# Altium PCB PCB_MEZON.PcbDoc
Units mm, origin at the board's own origin, x right, y up, seen from the top; angles counter-clockwise.
Board outline 76 x 56 mm, 2 copper layers (Top, GND), stack 0.325 mm thick; 4 components, 28 nets, 106 pads, 9 vias.
Unrouted connection lines stored in the file: 6.
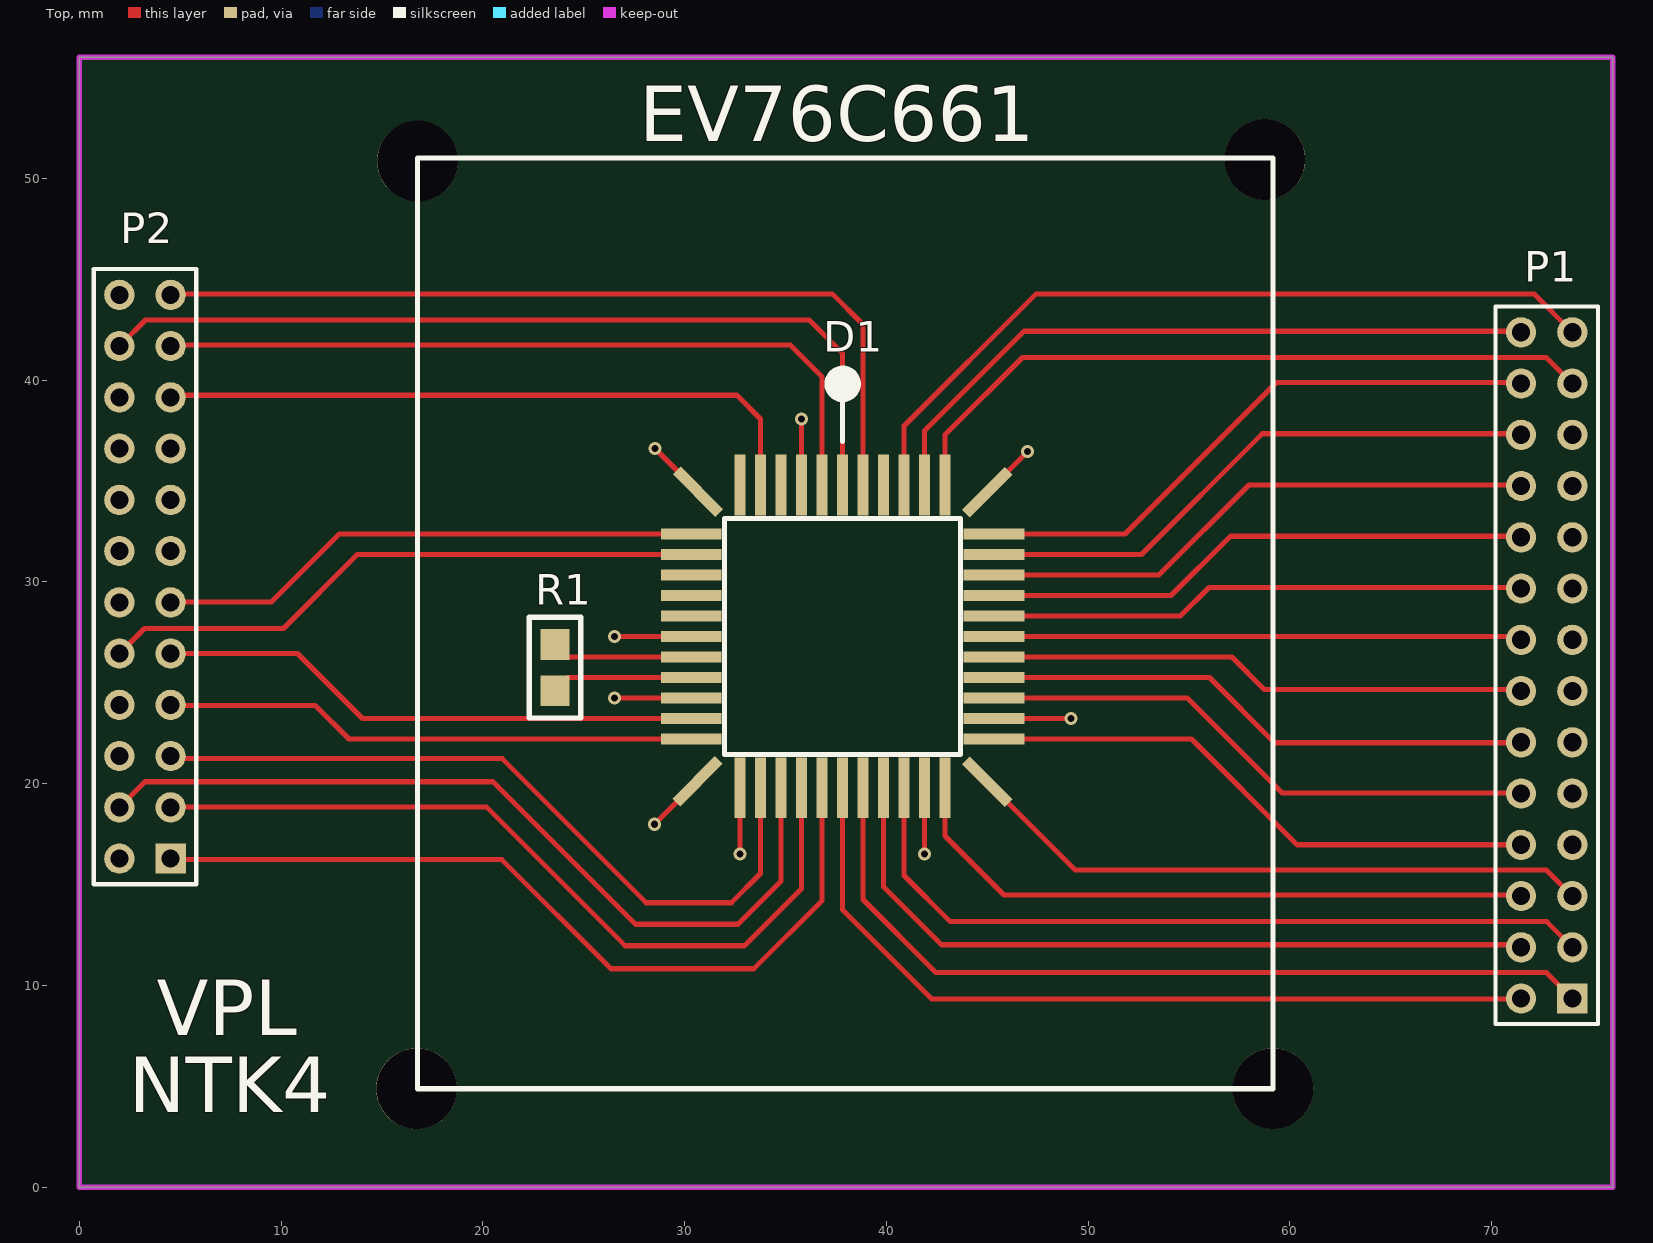
[diagram p0: Top view]
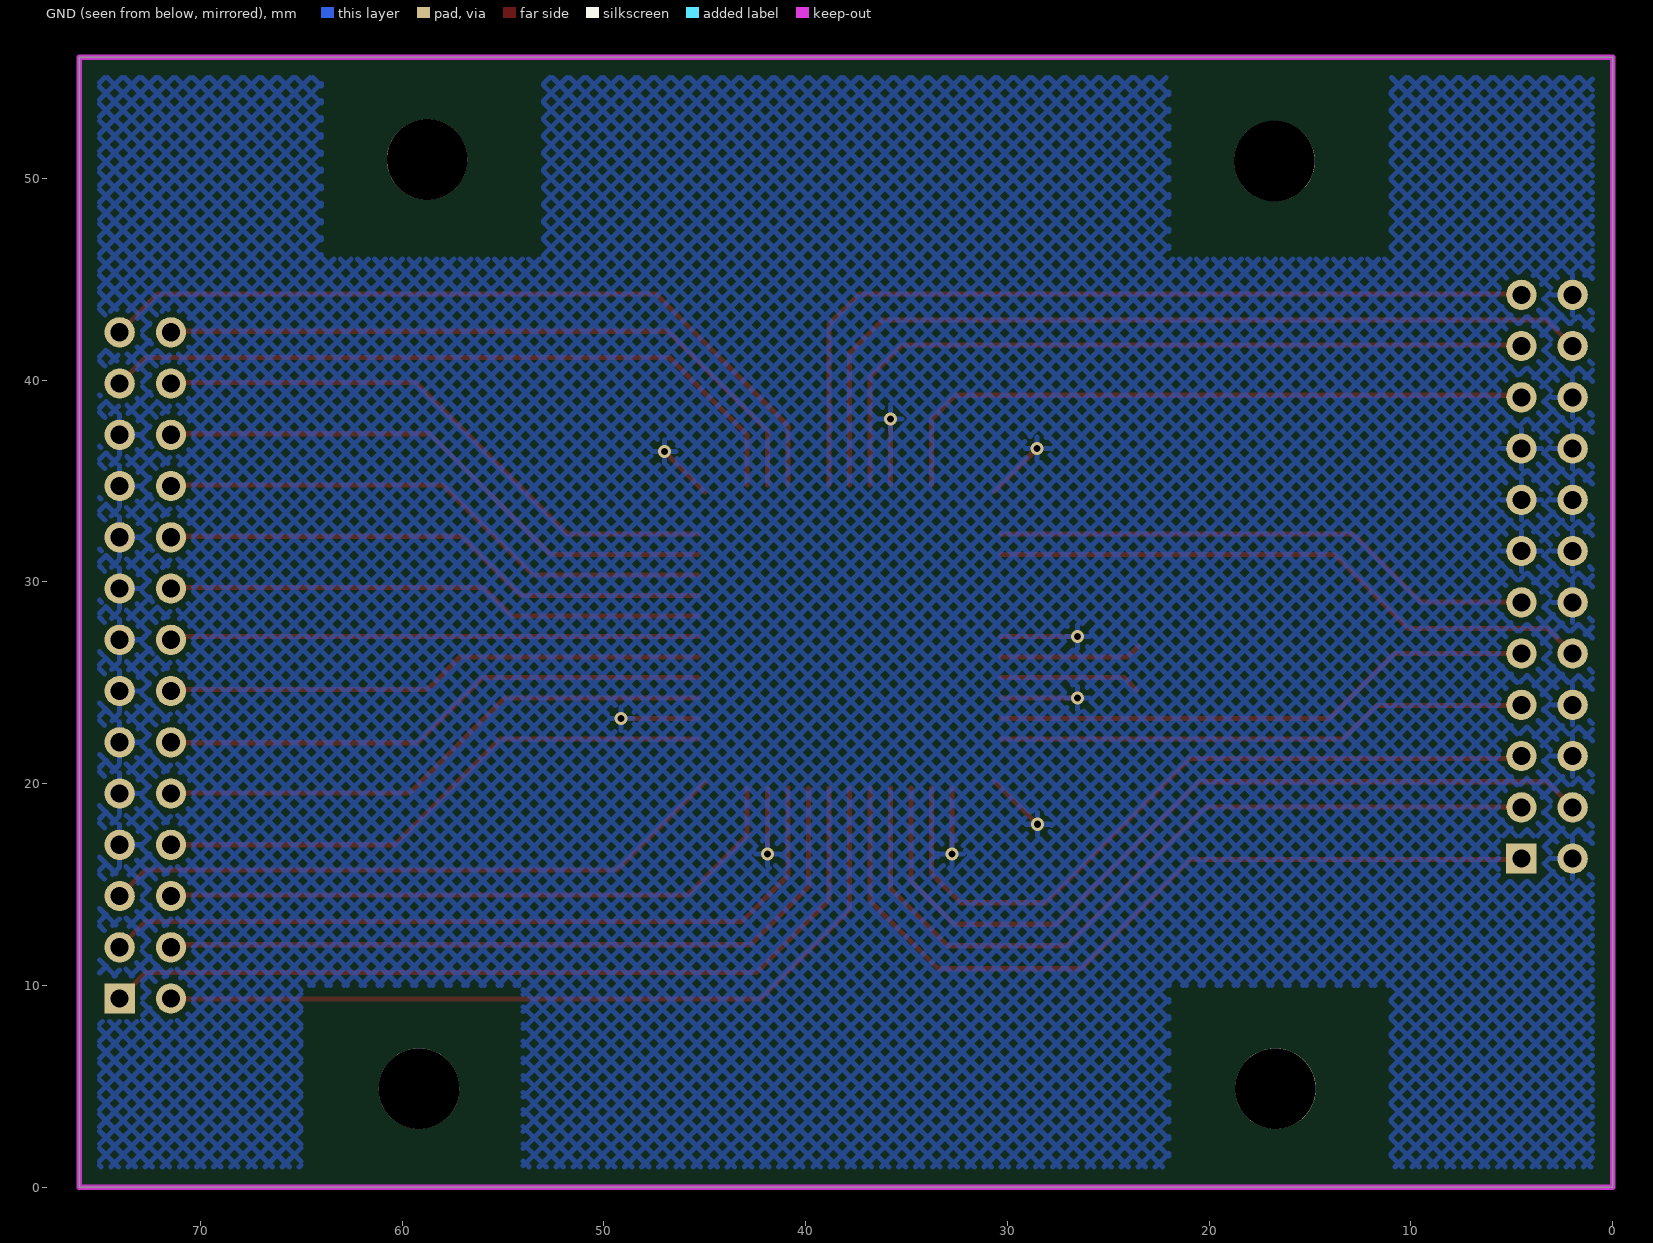
[diagram p1: GND view, seen from below]

## Layer stack, top to bottom
Top Solder: solder mask 0.0102, Solder Resist, Dk 3.5
Top: signal copper 0.0356
Dielectric 1: core 0.254, FR-4, Dk 4.2
GND: signal copper 0.0356
Bottom Solder: solder mask 0.0102, Solder Resist, Dk 3.5

## Board outline
0,0 76,0 76,56 0,56

## Design rules (kind name [scope] priority, off if disabled: settings)
Clearance [All] p1: gap=0.254
PolygonConnect [All] p1: connectstyle=Relief reliefconductorwidth=0.254 reliefentries=4 polygonreliefangle="90 Angle" airgapwidth=0.254
RoutingVias [All] p1: holewidth=0.711 width=1.27 viastyle="Through Hole" minholewidth=0.711 minwidth=1.27 maxholewidth=0.711 maxwidth=1.27
SolderMaskExpansion [All] p1: expansion=0.102
Width [All] p1: maxlimit=1.254 minlimit=0.254 preferedwidth=0.254
29 further rules are at their usual default settings.

## Components (designator, comment, footprint, x,y, rotation, side; value= is the part's Value field where it differs from the comment)
D1 "EV76C661" EV76C661 37.828,34.801 r0 top
P1 "Header 14X2A" HDR2X14_CEN 73.997,9.35 r90 top
P2 "Header 12X2" HDR2X12 4.528,16.285 r90 top
R1 "16.9к" RES 22.334,23.27 r0 top

## Footprints (in the part's own frame and the unit in brackets; to place one, negate y for a bottom-side part, rotate by r counter-clockwise, add the part's x,y. Pads: shape width x height; smd on the part's side, far side on the other; paste and mask are expansions set on the pad)
EV76C661 [mm]
  rect 0.55x3 smd: 1(0,0) 2(-1.016,0) 3(-2.032,0) 4(-3.048,0) 5(-4.064,0) 6(-5.08,0) 20(-5.08,-15.013) 21(-4.064,-15.013) 22(-3.048,-15.013) 23(-2.032,-15.013) 24(-1.016,-15.013) 25(0,-15.013) 26(1.016,-15.013) 27(2.032,-15.013) 28(3.048,-15.013) 29(4.064,-15.013) 30(5.08,-15.013) 44(5.08,0) 45(4.064,0) 46(3.048,0) 47(2.032,0) 48(1.016,0)
  rect 0.55x3 smd rot 45: 7(-7.163,-0.33) 31(7.163,-14.707)
  rect 3x0.55 smd: 8(-7.488,-2.434) 9(-7.488,-3.45) 10(-7.488,-4.466) 11(-7.488,-5.482) 12(-7.488,-6.498) 13(-7.488,-7.514) 14(-7.488,-8.53) 15(-7.488,-9.546) 16(-7.488,-10.562) 17(-7.488,-11.578) 18(-7.488,-12.594) 32(7.507,-12.594) 33(7.507,-11.578) 34(7.507,-10.562) 35(7.507,-9.546) 36(7.507,-8.53) 37(7.507,-7.514) 38(7.507,-6.498) 39(7.507,-5.482) 40(7.507,-4.466) 41(7.507,-3.45) 42(7.507,-2.434)
  rect 0.55x3 smd rot 135: 19(-7.188,-14.681) 43(7.163,-0.356)
  silkscreen extent -5.85,-13.36 5.85,5.31
HDR2X12 [mm] "Connector; Header; 12x2 Position"
  rect 1.5x1.5 hole 0.9: 1(0,0)
  round 1.5 hole 0.9: 2(0,2.54) 3(2.54,0) 4(2.54,2.54) 5(5.08,0) 6(5.08,2.54) 7(7.62,0) 8(7.62,2.54) 9(10.16,0) 10(10.16,2.54) 11(12.7,0) 12(12.7,2.54) 13(15.24,0) 14(15.24,2.54) 15(17.78,0) 16(17.78,2.54) 17(20.32,0) 18(20.32,2.54) 19(22.86,0) 20(22.86,2.54) 21(25.4,0) 22(25.4,2.54) 23(27.94,0) 24(27.94,2.54)
  silkscreen extent -1.27,-1.27 29.21,3.81
HDR2X14_CEN [mm] "Connector; Header; 14x2 Position"
  rect 1.5x1.5 hole 0.9: 1(0,0)
  round 1.5 hole 0.9: 2(2.54,0) 3(5.08,0) 4(7.62,0) 5(10.16,0) 6(12.7,0) 7(15.24,0) 8(17.78,0) 9(20.32,0) 10(22.86,0) 11(25.4,0) 12(27.94,0) 13(30.48,0) 14(33.02,0) 15(0,2.54) 16(2.54,2.54) 17(5.08,2.54) 18(7.62,2.54) 19(10.16,2.54) 20(12.7,2.54) 21(15.24,2.54) 22(17.78,2.54) 23(20.32,2.54) 24(22.86,2.54) 25(25.4,2.54) 26(27.94,2.54) 27(30.48,2.54) 28(33.02,2.54)
  silkscreen extent -1.27,-1.27 34.29,3.81
RES [mil] "FROM_MAX"
  rect 55.98x60 smd: 1(49,52.71) 2(49,142.71)
  silkscreen extent -1,0 99,196, body extent 17,19 81,177, height 100

## Part data
P1: "Header, 14-Pin, Dual row"
P2: "Header, 12-Pin, Dual row"
R1: library part RES

## Free pads (board coordinates)
  round 4 hole 4: 0(16.72,4.88) 0(16.771,50.854) 0(58.757,50.93) 0(59.164,4.88)

## Via types
v1: diameter 0.65, hole 0.35, Top to GND, 9 vias

## Nets (pads, with @x,y where several pads share a name; then routed paths per layer and width w, separated by ;. In a path a pad name is that pad's centre, name@x,y a point inside that pad or via, vN(x,y) a via of type N, cw(c..) or ccw(c..) an arc to the next point about the centre after c; other vN are vias at no path point)
ADCREF1: D1.14 R1.2 | length 7.1
  Top w0.254: R1.2@23.502,26.818 24.049,26.271 D1.14
ADCREF2: D1.15 R1.1 | length 7
  Top w0.254: R1.1 24.225,25.255 D1.15
CLKFIX: D1.22 P2.4 | length 41.7
  Top w0.254: P2.4 3.258,20.095 20.505,20.095 27.566,13.033 32.646,13.033 34.78,15.167 D1.22
CLKREF: D1.23 P2.3 | length 40.3
  Top w0.254: P2.3@4.528,18.85 20.175,18.85 27.058,11.967 32.976,11.967 35.796,14.786 D1.23
CSN: D1.46 P1.14 | length 39.5
  Top w0.254: D1.46 40.876,37.722 47.429,44.275 72.092,44.275 P1.14
D0: D1.25 P1.15 | length 41.5
  Top w0.254: D1.25 37.828,13.745 42.247,9.325 P1.15@71.457,9.325
D1: D1.26 P1.1 | length 42.7
  Top w0.254: D1.26 38.844,14.253 42.45,10.646 72.702,10.646 P1.1
D2: D1.27 P1.16 | length 37.7
  Top w0.254: D1.27 39.86,14.888 42.73,12.017 P1.16@71.457,12.017
D3: D1.28 P1.2 | length 38.9
  Top w0.254: D1.28 40.876,15.446 43.162,13.16 72.727,13.16 P1.2
D4: D1.31 P1.3 | length 31.4
  Top w0.254: D1.31 49.359,15.726 72.702,15.726 P1.3
D5: D1.32 P1.18 | length 28.3
  Top w0.254: D1.32 55.12,22.207 60.357,16.97 P1.18
D6: D1.35 P1.20 | length 27.5
  Top w0.254: D1.35 56.009,25.255 59.24,22.025 P1.20@71.457,22.025
D7: D1.36 P1.21 | length 26.8
  Top w0.254: D1.36 57.127,26.271 58.732,24.667 71.381,24.667 P1.21
D8: D1.37 P1.22 | length 26.2
  Top w0.254: D1.37 71.3,27.287 P1.22
D9: D1.38 P1.23 | length 26.7
  Top w0.254: D1.38 54.571,28.303 55.989,29.721 P1.23@71.457,29.721
DATACLK: D1.24 P2.1 | length 41.5
  Top w0.254: P2.1@4.528,16.234 20.937,16.234 26.347,10.824 33.433,10.824 36.812,14.202 D1.24
FEN: D1.40 P1.25 | length 28
  Top w0.254: D1.40 53.504,30.335 57.97,34.801 P1.25@71.457,34.801
FLO: D1.48 P2.23 | length 42.9
  Top w0.254: P2.23@4.528,44.275 37.32,44.275 38.844,42.751 D1.48
GND: D1.3 D1.7 D1.13 D1.16 D1.19 D1.20 D1.29 D1.33 D1.43 P1.4 P1.5 P1.6 P1.7 P1.8 P1.9 P1.10 P1.11 P1.12 P2.2 P2.6 P2.8 P2.12 P2.13 P2.14 P2.15 P2.16 P2.17 P2.18 P2.20 P2.24 | length 30.1
  Top w0.254: v1(26.525,24.239) D1.16 ; v1(26.525,27.287) D1.13 ; v1(28.506,17.986) D1.19 ; v1(28.531,36.605) D1.7 ; v1(32.748,16.512) D1.20 ; D1.3 v1(35.796,38.078) ; v1(41.892,16.512) D1.29 ; D1.43 v1(46.997,36.452) ; D1.33 v1(49.149,23.223)
LEN: D1.39 P1.24 | length 27.3
  Top w0.254: D1.39 54.114,29.319 57.055,32.261 P1.24@71.457,32.261
MISO: D1.45 P1.28 | length 34.3
  Top w0.254: D1.45 41.892,37.494 46.819,42.421 P1.28@71.457,42.421
MOSI: D1.42 P1.27 | length 29.2
  Top w0.254: D1.42 51.823,32.367 59.337,39.881 P1.27@71.457,39.881
RESET: D1.1 P2.22 | length 43.7
  Top w0.254: P2.22@1.849,41.824 2.128,41.824 3.284,42.98 36.177,42.98 37.828,41.329 D1.1
SCK: D1.41 P1.26 | length 28.6
  Top w0.254: D1.41 52.64,31.351 58.63,37.341 P1.26@71.457,37.341
TRIG: D1.2 P2.21 | length 38.3
  Top w0.254: P2.21@4.528,41.735 35.237,41.735 36.812,40.161 D1.2
VDD18A: D1.9 D1.18 P2.7 P2.10 | length 56.9
  Top w0.254: P2.10 3.233,27.689 10.116,27.689 13.778,31.351 D1.9 ; P2.7@4.528,23.879 11.691,23.879 13.363,22.207 D1.18
VDD18D: D1.21 D1.30 D1.34 D1.44 P1.13 P1.17 P1.19 P2.5 | length 133
  Top w0.254: P2.5@4.528,21.238 20.962,21.238 28.099,14.1 32.316,14.1 33.764,15.548 D1.21 ; D1.30 42.908,17.402 45.829,14.481 P1.17@71.457,14.481 ; D1.44 42.908,37.29 46.743,41.126 72.702,41.126 P1.13 ; D1.34 54.917,24.239 59.621,19.536 P1.19@71.457,19.536
VDD33A: D1.5 D1.8 D1.17 P2.9 P2.11 P2.19 | length 87.3
  Top w0.254: P2.9 10.811,26.445 14.032,23.223 D1.17 ; P2.11@4.528,29.01 9.532,29.01 12.889,32.367 D1.8 ; P2.19@4.528,39.246 32.595,39.246 33.764,38.078 D1.5
pads on no net: D1.4 D1.6 D1.10 D1.11 D1.12 D1.47

## Polygon pours and split planes (outlines as drawn)
GND on GND "Top Layer-No Net" (hatched 45Degree grid 0.6 track 0.25, remove dead copper, pour order 4): 1,55 75,55 75,1 1,1

## Keep-outs
Keep-Out Layer:
  the board outline again, w0.254

## Other copper
GND:
  pour cut-out: 53,46 64,46 64,56 53,56
  pour cut-out: 11,46 22,46 22,56 11,56
  pour cut-out: 54,0 65,0 65,10 54,10
  pour cut-out: 11,0 22,0 22,10 11,10

## Silkscreen, mask and mechanical layers (free items; w line width, h text height)
Top Overlay:
  lines w0.254: 16.771,4.88 59.164,4.88 59.164,51 16.771,51 16.771,4.88
  text "EV76C661" at 27.764,51.841 h2.75
  text "VPL" at 3.835,7.518 h2.75
  text "NTK4" at 2.461,3.708 h2.75